# EAGLE board RGBW+Bluetooth+adapter (EAGLE 5.10), part 1 of 3
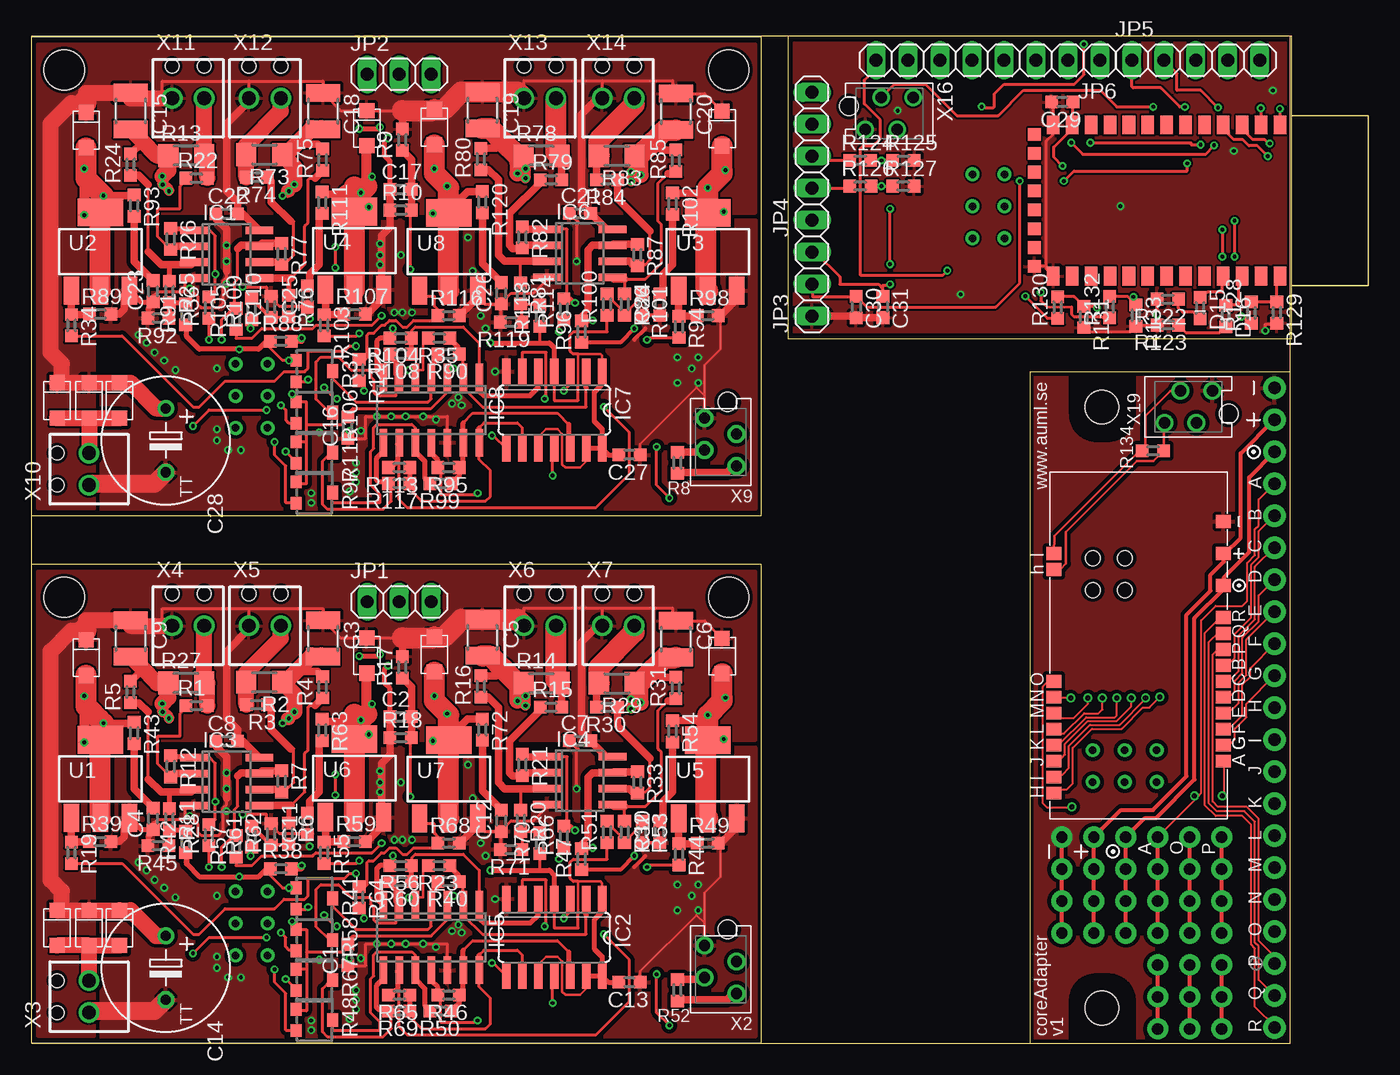
[diagram p0: board, top side]
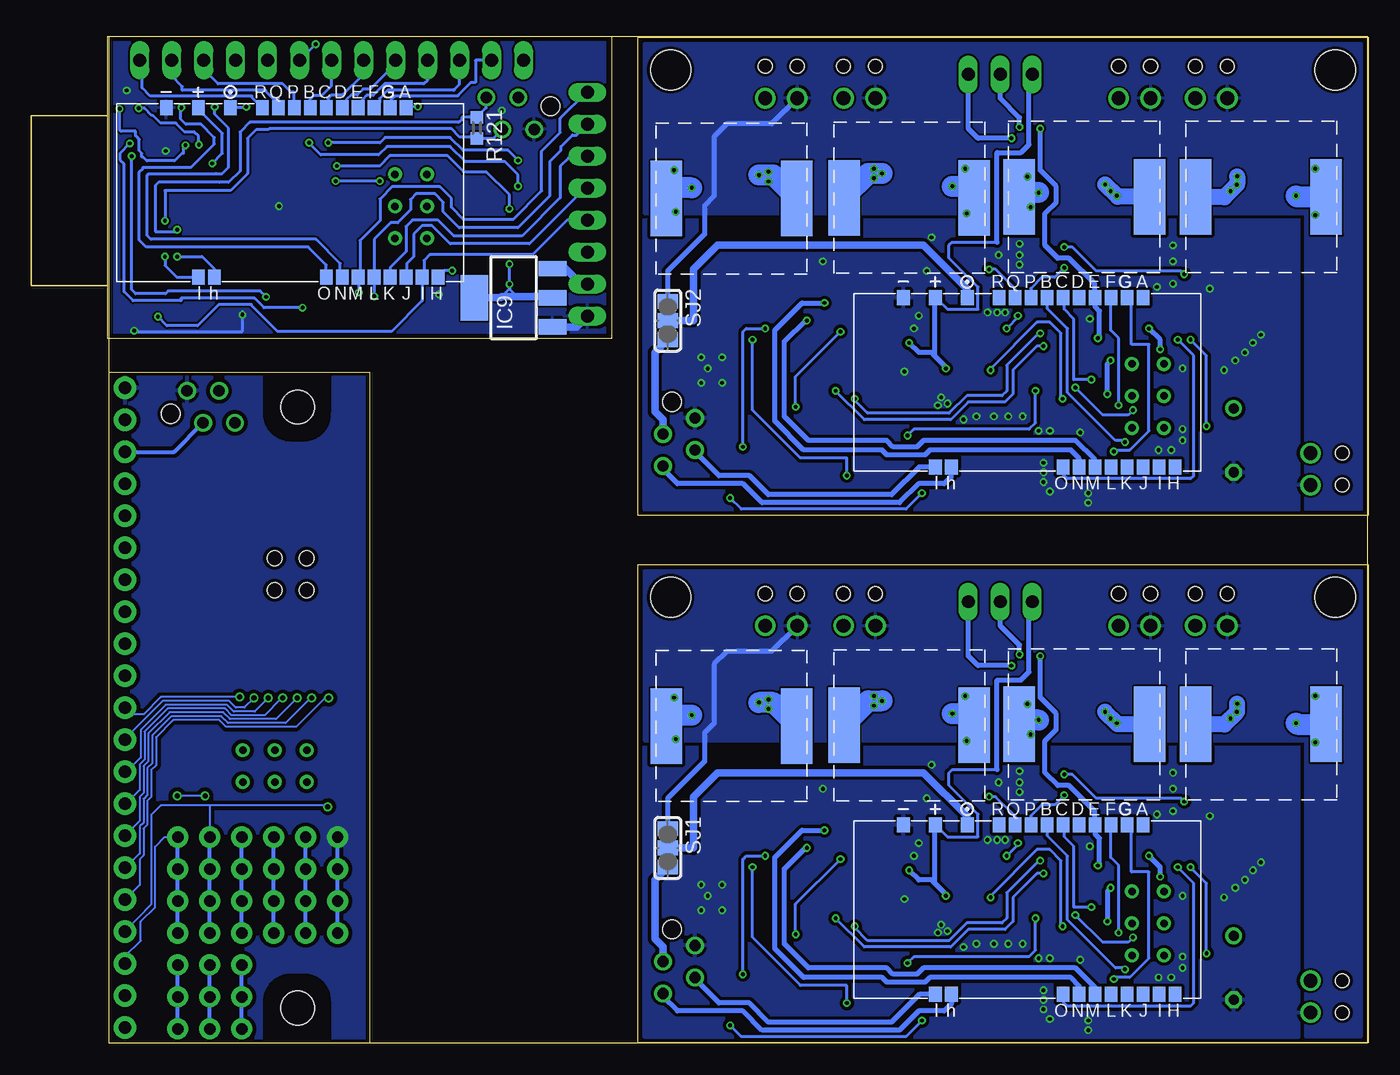
[diagram p1: board, bottom side, seen from below]

Size 100.1 x 80 mm. Coordinates in mm from the lower left corner, seen from the top.
Outline: 0,80 100,80 100,0 0,0 0,80
Outline: 58,80.01 0,80
Outline: 0,0.03 58,0.03 58,38.03 0,38.03 0,0.03
Outline: 0,41.93 58,41.93 58,79.93 0,79.93 0,41.93
Outline: 60.1,56 100.1,56 100.1,80 60.1,80 60.1,56
Outline: 100.01,0 100.01,53.34 79.3,53.34 79.3,0 100.01,0
Copper layers (1*16): Top 0.035mm / dielectric 1.5mm / Bottom 0.035mm
Design rules "ITead_rule": minimum track width 6mil, minimum drill 12mil, track to track 6mil, track to pad 6mil, pad to pad 6mil, via to via 6mil, smd to smd 0mil, copper to edge 10mil, drill to drill 10mil, minimum pad ring 10mil, minimum via ring 6mil, stop-mask expansion 2mil, vias tented up to drill 100mil, thermal gap 10mil
Holes 3.2 mm at 2.6,35.43 55.4,35.43 2.6,77.33 55.4,77.33
Holes 2.7 mm at 85.02,50.55 85.02,2.79

## Footprints (pad centres in the part's own frame; a part is rotated, then mirrored left to right if it is on the bottom)
C0603 = smd 1 x 1: 1 -0.85,0; 2 0.85,0
C1210 = smd 1.4 x 2.7: 1 -1.4,0; 2 1.5,0
TT5D10 = drill 0.813 round: + -2.54,0 | drill 0.813 octagon: - 2.54,0
SOD-123W = smd 1.2 x 1.2: A 1.4,0; C -1.4,0
0603 = smd 0.991 x 1.016: A -0.85,0; C 0.85,0
SO08 = smd 0.6 x 2.2: 1 -1.905,-2.6; 2 -0.635,-2.6; 3 0.635,-2.6; 4 1.905,-2.6; 5 1.905,2.6; 6 0.635,2.6; 7 -0.635,2.6; 8 -1.905,2.6
SO14 = smd 0.66 x 2.032: 1 -3.81,-3.073; 2 -2.54,-3.073; 3 -1.27,-3.073; 4 0,-3.073; 5 1.27,-3.073; 6 2.54,-3.073; 7 3.81,-3.073; 8 3.81,3.073; 9 2.54,3.073; 10 1.27,3.073; 11 0,3.073; 12 -1.27,3.073; 13 -2.54,3.073; 14 -3.81,3.073
SO14' = smd 0.6 x 2.2: 1 -3.81,-2.6; 2 -2.54,-2.6; 3 -1.27,-2.6; 4 0,-2.6; 5 1.27,-2.6; 6 2.54,-2.6; 7 3.81,-2.6; 8 3.81,2.6; 9 2.54,2.6; 10 1.27,2.6; 11 0,2.6; 12 -1.27,2.6; 13 -2.54,2.6; 14 -3.81,2.6
SOT223 = smd 1.219 x 2.235: 1 -2.311,-3.099; 2 0,-3.099; 3 2.311,-3.099 | smd 3.6 x 2.2: 4 0,3.099
1X03 = drill 1.016 long: 1 -2.54,0; 2 0,0; 3 2.54,0
1X05 = drill 1.016 long: 1 -5.08,0; 2 -2.54,0; 3 0,0; 4 2.54,0; 5 5.08,0
1X08 = drill 1.016 long: 1 -8.89,0; 2 -6.35,0; 3 -3.81,0; 4 -1.27,0; 5 1.27,0; 6 3.81,0; 7 6.35,0; 8 8.89,0
R0603 = smd 0.991 x 1.016: 1 -0.85,0; 2 0.85,0
R1206 = smd 1.6 x 1.803: 1 -1.422,0; 2 1.422,0
TRIM_PVZ3 = smd 1 x 0.9: 1 0.5,0.45; 3 2.2,0.45 | smd 1.1 x 0.9: 2 1.35,3.35
SJ_2_NO = smd 1.168 x 1.6: 1 -1.524,0; 2 0,0; 3 1.524,0
12X12 = smd 6 x 2.5: P$1 6,0.79; P$2 6,11.15
BC4 = smd 1.5 x 1: 1 -5.75,9.5; 2 -5.75,8; 3 -5.75,6.5; 4 -5.75,5; 5 -5.75,3.5; 6 -5.75,2; 7 -5.75,0.5; 8 -5.75,-1; 9 -5.75,-2.5; 10 -5.75,-4; 11 -5.75,-5.5; 12 -5.75,-7; 13 -5.75,-8.5; 22 6.25,-8.5; 23 6.25,-7; 24 6.25,-5.5; 25 6.25,-4; 26 6.25,-2.5; 27 6.25,-1; 28 6.25,0.5; 29 6.25,2; 30 6.25,3.5; 31 6.25,5; 32 6.25,6.5; 33 6.25,8; 34 6.25,9.5 | smd 1 x 1: 14 -5,-10; 15 -3.5,-10; 16 -2,-10; 17 -0.5,-10; 18 1,-10; 19 2.5,-10; 20 4,-10; 21 5.5,-10
CORETWO_LAYOUT_ISPHOLES_CU = smd 1 x 1.2: 5V 7.315,-6.648; A -9.195,-6.648; B -1.575,-6.648; C -2.845,-6.648; CANH 6.045,6.814; CANL 7.315,6.814; D -4.115,-6.648; E -5.385,-6.648; F -6.655,-6.648; G -7.925,-6.648; GND 9.855,-6.648; H -11.735,6.814; I -10.465,6.814; J -9.195,6.814; K -7.925,6.814; L -6.655,6.814; M -5.385,6.814; N -4.115,6.814; O -2.845,6.814; P -0.305,-6.648; Q 0.965,-6.648; R 2.235,-6.648; VCAN 4.775,-6.648 | drill 0.6 round: P$1 -10.846,3.708; P$2 -8.306,3.708; P$3 -10.846,1.168; P$4 -8.306,1.168; P$5 -8.306,-1.372; P$6 -10.846,-1.372
MICROMATCH-4 = drill 0.9 round: 1 1.905,1.27; 2 0.635,-1.27; 3 -0.635,1.27; 4 -1.905,-1.27 | hole 1.5: 3.199,-0.562
PCB2 = drill 1.1 round: 1 -2.54,0; 2 0,0 | hole 1.1: -2.54,2.54; 0,2.54
CORE_IOHEAD_NOSILC = drill 1 pad 1.778 round: 1 25.4,0; 2 22.86,0; 3 20.32,0; 4 17.78,0; 5 15.24,0; 6 12.7,0; 7 10.16,0; 8 7.62,0; 9 5.08,0; 10 2.54,0; 11 0,0; 12 -2.54,0; 13 -5.08,0; 14 -7.62,0; 15 -10.16,0; 16 -12.7,0; 17 -15.24,0; 18 -17.78,0; 19 -20.32,0; 20 -22.86,0; 21 -25.4,0
CORETWO_LAYOUT_CU = smd 1 x 1.2: 5V 7.62,-7.258; A -8.89,-7.258; B -1.27,-7.258; C -2.54,-7.258; CANH 6.35,6.204; CANL 7.62,6.204; D -3.81,-7.258; E -5.08,-7.258; F -6.35,-7.258; G -7.62,-7.258; GND 10.16,-7.258; H -11.43,6.204; I -10.16,6.204; J -8.89,6.204; K -7.62,6.204; L -6.35,6.204; M -5.08,6.204; N -3.81,6.204; O -2.54,6.204; P 0,-7.258; Q 1.27,-7.258; R 2.54,-7.258; VCAN 5.08,-7.258 | drill 0.6 round: P$1 -10.541,3.099; P$2 -8.001,3.099; P$3 -10.541,0.559; P$4 -8.001,0.559; P$5 -8.001,-1.981; P$6 -10.541,-1.981 | hole 1.2: 4.699,3.099; 7.239,3.099; 7.239,0.559; 4.699,0.559

## Placement (x,y rotation side)
C1  100n  [C0603]  25.15,7.01 90 top
C2  100n  [C0603]  29.34,25.94 0 top
C3  [C1210]  23.16,32.2 270 top
C4  10n  [C0603]  9.67,17.84 90 top
C5  [C1210]  35.81,32.29 270 top
C6  [C1210]  51.18,32.16 270 top
C7  100n  [C0603]  43.56,24.03 0 top
C8  100n  [C0603]  15.52,24.01 0 top
C9  [C1210]  7.87,32.22 270 top
C10  10n  [C0603]  49.91,16.79 90 top
C11  10n  [C0603]  21.92,17.43 90 top
C12  10n  [C0603]  37.34,17.68 90 top
C13  100n  [C0603]  47.5,4.85 180 top
C14  EEUFK1V102L  [TT5D10]  10.67,6 270 top
C15  [C1210]  7.87,74.11 270 top
C16  100n  [C0603]  25.15,48.91 90 top
C17  100n  [C0603]  29.34,67.84 0 top
C18  [C1210]  23.16,74.11 270 top
C19  [C1210]  35.81,74.19 270 top
C20  [C1210]  51.18,74.06 270 top
C21  100n  [C0603]  43.56,65.93 0 top
C22  100n  [C0603]  15.52,65.91 0 top
C23  10n  [C0603]  9.67,59.74 90 top
C24  10n  [C0603]  49.91,58.69 90 top
C25  10n  [C0603]  21.92,59.34 90 top
C26  10n  [C0603]  37.34,59.58 90 top
C27  100n  [C0603]  47.5,46.75 180 top
C28  EEUFK1V102L  [TT5D10]  10.67,47.9 270 top
C29  100n  [C0603]  81.87,74.77 180 top
C30  0.22µ  [C0603]  65.51,58.5 270 top
C31  100n  [C0603]  67.63,58.5 270 top
D1  [SOD-123W]  4.35,30.64 270 top
D2  [SOD-123W]  26.64,30.8 270 top
D3  [SOD-123W]  32,30.89 270 top
D4  [SOD-123W]  54.86,30.76 270 top
D5  [SOD-123W]  2.03,9.17 270 top
D6  [SOD-123W]  4.57,9.17 270 top
D7  [SOD-123W]  6.98,9.17 270 top
D8  [SOD-123W]  4.35,72.54 270 top
D9  [SOD-123W]  2.03,51.07 270 top
D10  [SOD-123W]  26.64,72.7 270 top
D11  [SOD-123W]  32,72.79 270 top
D12  [SOD-123W]  54.86,72.66 270 top
D13  [SOD-123W]  4.57,51.07 270 top
D14  [SOD-123W]  6.98,51.07 270 top
D15  LED  [0603]  92.83,58.42 270 top
D16  LED  [0603]  94.86,57.78 270 top
IC1  TL082D  [SO08]  15.5,62.69 270 top
IC2  74HC126D  [SO14]  41.53,8.41 180 top
IC3  TL082D  [SO08]  15.5,20.79 270 top
IC4  TL082D  [SO08]  43.56,20.86 270 top
IC5  LM339D  [SO14']  31.75,8.41 180 top
IC6  TL082D  [SO08]  43.56,62.76 270 top
IC7  74HC126D  [SO14]  41.53,50.31 180 top
IC8  LM339D  [SO14']  31.75,50.31 180 top
IC9  LM1117MP-3.3  [SOT223]  67.88,59.23 90 bottom
JP1  [1X03]  29.21,35.08 0 top
JP2  [1X03]  29.21,76.98 0 top
JP3  [1X03]  62.01,60.32 90 top
JP4  [1X05]  62.01,70.48 90 top
JP5  [1X05]  92.49,78.1 0 top
JP6  [1X08]  75.98,78.1 180 top
R1  5k  [R0603]  13.11,26.83 0 top
R2  0R1  [R1206]  18.49,28.7 180 top
R3  5k  [R0603]  17.91,26.9 180 top
R4  5k  [R0603]  23.13,28.29 90 top
R5  5k  [R0603]  7.87,27.91 90 top
R6  250k  [R0603]  20.43,16.66 270 top
R7  250k  [R0603]  19.87,20.81 270 top
R8  [R0603]  51.31,46.12 90 top
R9  47k  [R0603]  29.46,71.77 90 top
R10  12k  [R0603]  29.34,66.19 0 top
R11  250k  [R0603]  10.96,17.8 270 top
R12  250k  [R0603]  11.06,22 270 top
R13  0R1  [R1206]  12.3,70.52 0 top
R14  0R1  [R1206]  40.51,28.6 0 top
R15  5k  [R0603]  41.27,26.7 0 top
R16  5k  [R0603]  35.69,28.35 90 top
R17  47k  [R0603]  29.46,29.87 90 top
R18  12k  [R0603]  29.34,24.29 0 top
R19  10  [R0603]  3.17,15.14 270 top
R20  250k  [R0603]  38.86,17.68 270 top
R21  250k  [R0603]  38.99,22.13 270 top
R22  5k  [R0603]  13.11,68.73 0 top
R23  40k  [R0603]  32.38,14.12 180 top
R24  5k  [R0603]  7.87,69.81 90 top
R25  250k  [R0603]  10.96,59.7 270 top
R26  250k  [R0603]  11.06,63.9 270 top
R27  0R1  [R1206]  12.3,28.62 0 top
R28  1k  [R0603]  14.1,16.54 90 top
R29  0R1  [R1206]  46.48,28.6 180 top
R30  5k  [R0603]  45.72,26.7 180 top
R31  5k  [R0603]  51.18,28.22 90 top
R32  250k  [R0603]  47.12,16.79 270 top
R33  250k  [R0603]  48.13,20.73 270 top
R34  10  [R0603]  3.17,57.04 270 top
R35  40k  [R0603]  32.38,56.02 180 top
R36  1k  [R0603]  14.1,58.44 90 top
R37  [TRIM_PVZ3]  20.57,54.76 270 top
R38  40k  [R0603]  19.81,13.87 0 top
R39  10k  [R0603]  5.46,16.03 0 top
R40  15k  [R0603]  33.15,12.86 180 top
R41  [TRIM_PVZ3]  20.57,12.86 270 top
R42  500  [R0603]  12.25,16.01 90 top
R43  500  [R0603]  8.16,24.65 270 top
R44  10  [R0603]  51.43,15.01 270 top
R45  10k  [R0603]  10.09,15.71 180 top
R46  40k  [R0603]  33.15,3.84 180 top
R47  1k  [R0603]  43.69,14.63 90 top
R48  [TRIM_PVZ3]  20.57,3.2 270 top
R49  10k  [R0603]  53.72,15.9 0 top
R50  15k  [R0603]  32.51,2.57 180 top
R51  500  [R0603]  45.72,16.79 90 top
R52  [R0603]  51.31,4.22 90 top
R53  10k  [R0603]  48.51,16.79 270 top
R54  500  [R0603]  50.93,24.79 270 top
R55  10  [R0603]  23.24,15.14 270 top
R56  40k  [R0603]  29.34,14.12 180 top
R57  1k  [R0603]  16.26,15.65 90 top
R58  [TRIM_PVZ3]  20.57,9.55 270 top
R59  10k  [R0603]  25.65,16.03 0 top
R60  15k  [R0603]  29.34,12.86 180 top
R61  500  [R0603]  17.49,16.42 90 top
R62  10k  [R0603]  19.05,16.61 90 top
R63  500  [R0603]  23.1,24.89 270 top
R64  10  [R0603]  26.04,11.59 270 top
R65  40k  [R0603]  29.21,3.84 180 top
R66  1k  [R0603]  42.29,16.41 90 top
R67  [TRIM_PVZ3]  20.57,6.38 270 top
R68  10k  [R0603]  33.15,15.9 0 top
R69  15k  [R0603]  29.21,2.57 180 top
R70  500  [R0603]  40.39,15.9 90 top
R71  10k  [R0603]  38.1,15.39 180 top
R72  500  [R0603]  35.81,24.92 270 top
R73  0R1  [R1206]  18.49,70.6 180 top
R74  5k  [R0603]  17.91,68.8 180 top
R75  5k  [R0603]  23.13,70.19 90 top
R76  250k  [R0603]  20.43,58.56 270 top
R77  250k  [R0603]  19.87,62.71 270 top
R78  0R1  [R1206]  40.51,70.5 0 top
R79  5k  [R0603]  41.27,68.6 0 top
R80  5k  [R0603]  35.69,70.25 90 top
R81  250k  [R0603]  38.86,59.58 270 top
R82  250k  [R0603]  38.99,64.03 270 top
R83  0R1  [R1206]  46.48,70.5 180 top
R84  5k  [R0603]  45.72,68.6 180 top
R85  5k  [R0603]  51.18,70.12 90 top
R86  250k  [R0603]  47.12,58.69 270 top
R87  250k  [R0603]  48.13,62.63 270 top
R88  40k  [R0603]  19.81,55.77 0 top
R89  10k  [R0603]  5.46,57.93 0 top
R90  15k  [R0603]  33.15,54.76 180 top
R91  500  [R0603]  12.25,57.91 90 top
R92  10k  [R0603]  10.09,57.61 180 top
R93  500  [R0603]  8.16,66.55 270 top
R94  10  [R0603]  51.43,56.91 270 top
R95  40k  [R0603]  33.15,45.74 180 top
R96  1k  [R0603]  43.69,56.53 90 top
R97  [TRIM_PVZ3]  20.57,45.1 270 top
R98  10k  [R0603]  53.72,57.8 0 top
R99  15k  [R0603]  32.51,44.47 180 top
R100  500  [R0603]  45.72,58.69 90 top
R101  10k  [R0603]  48.51,58.69 270 top
R102  500  [R0603]  50.93,66.69 270 top
R103  10  [R0603]  23.24,57.04 270 top
R104  40k  [R0603]  29.34,56.02 180 top
R105  1k  [R0603]  16.26,57.55 90 top
R106  [TRIM_PVZ3]  20.57,51.45 270 top
R107  10k  [R0603]  25.65,57.93 0 top
R108  15k  [R0603]  29.34,54.76 180 top
R109  500  [R0603]  17.49,58.32 90 top
R110  10k  [R0603]  19.05,58.51 90 top
R111  500  [R0603]  23.1,66.79 270 top
R112  10  [R0603]  26.04,53.48 270 top
R113  40k  [R0603]  29.21,45.74 180 top
R114  1k  [R0603]  42.29,58.31 90 top
R115  [TRIM_PVZ3]  20.57,48.28 270 top
R116  10k  [R0603]  33.15,57.8 0 top
R117  15k  [R0603]  29.21,44.47 180 top
R118  500  [R0603]  40.39,57.8 90 top
R119  10k  [R0603]  38.1,57.3 180 top
R120  500  [R0603]  35.81,66.82 270 top
R121  [R0603]  70.79,72.72 270 bottom
R122  1k  [R0603]  90.26,59.11 180 top
R123  1k  [R0603]  90.27,57.07 180 top
R124  4k7  [R0603]  65.83,70.14 0 top
R125  6k8  [R0603]  69.27,70.14 0 top
R126  4k7  [R0603]  65.84,68.1 0 top
R127  6k8  [R0603]  69.25,68.1 0 top
R128  4k7  [R0603]  96.9,58.03 90 top
R129  6k8  [R0603]  98.93,58.05 270 top
R130  4k7  [R0603]  81.52,58.46 90 top
R131  6k8  [R0603]  83.59,57.71 270 top
R132  4k7  [R0603]  85.65,58.5 90 top
R133  6k8  [R0603]  87.73,57.82 270 top
R134  [R0603]  89.08,47.07 180 top
SJ1  [SJ_2_NO]  55.63,15.52 270 bottom
SJ2  [SJ_2_NO]  55.63,57.42 270 bottom
U1  NFT3055L175  [SOT223]  5.48,21 0 top
U2  NFT3055L175  [SOT223]  5.48,62.9 0 top
U3  NFT3055L175  [SOT223]  53.72,62.88 0 top
U4  NFT3055L175  [SOT223]  25.66,62.96 0 top
U5  NFT3055L175  [SOT223]  53.72,20.98 0 top
U6  NFT3055L175  [SOT223]  25.66,21.06 0 top
U7  NFT3055L175  [SOT223]  33.15,20.98 0 top
U8  NFT3055L175  [SOT223]  33.15,62.88 0 top
U$1  12X12  [12X12]  44.58,19.2 90 bottom
U$2  12X12  [12X12]  42.42,31.27 270 bottom
U$3  12X12  [12X12]  16.56,19.34 90 bottom
U$4  12X12  [12X12]  14.48,31.34 270 bottom
U$5  12X12  [12X12]  44.58,61.1 90 bottom
U$6  12X12  [12X12]  42.42,73.17 270 bottom
U$7  12X12  [12X12]  16.56,61.24 90 bottom
U$8  12X12  [12X12]  14.48,73.24 270 bottom
U$9  BT_BC4  [BC4]  89.67,67.21 270 top
X1  CORETWO_LAYOUTISPHOLES_CU  [CORETWO_LAYOUT_ISPHOLES_CU]  27.05,10.7 180 bottom
X2  MICROMATCH-4  [MICROMATCH-4]  54.74,5.87 90 top
X3  BLOCK2  [PCB2]  4.57,4.98 90 top
X4  BLOCK2  [PCB2]  13.72,33.17 0 top
X5  BLOCK2  [PCB2]  19.81,33.17 0 top
X6  BLOCK2  [PCB2]  41.66,33.17 0 top
X7  BLOCK2  [PCB2]  47.88,33.17 0 top
X8  CORETWO_LAYOUTISPHOLES_CU  [CORETWO_LAYOUT_ISPHOLES_CU]  27.05,52.6 180 bottom
X9  MICROMATCH-4  [MICROMATCH-4]  54.74,47.77 90 top
X10  BLOCK2  [PCB2]  4.57,46.88 90 top
X11  BLOCK2  [PCB2]  13.72,75.08 0 top
X12  BLOCK2  [PCB2]  19.81,75.08 0 top
X13  BLOCK2  [PCB2]  41.66,75.08 0 top
X14  BLOCK2  [PCB2]  47.88,75.08 0 top
X15  CORETWO_LAYOUTISPHOLES_CU  [CORETWO_LAYOUT_ISPHOLES_CU]  85.6,67.67 180 bottom
X16  MICROMATCH-4  [MICROMATCH-4]  68.13,73.87 180 top
X17  CORE_IOHEADEXP  [CORE_IOHEAD_NOSILC]  98.73,26.67 90 bottom
X18  CORETWO_LAYOUTALLHOLES_CU  [CORETWO_LAYOUT_CU]  87.41,31.29 90 top
X19  MICROMATCH-4  [MICROMATCH-4]  91.9,50.57 0 top

## Library data of the parts
C1-C31 R1-R134 = rcl
D1-D14 = diode
D15 D16 = led
IC1 IC3-IC6 IC8 = linear
IC2 IC7 = 74xx-eu
IC9 = lm1117mp
JP1-JP6 = pinhead
SJ1 SJ2 = jumper
U1-U8 = NMOS_NTF3055L175
U$1-U$8 = inductor10x10
U$9 = bluetooth
X1 X8 X15 X17 X18 = expboard
X2 X9 X16 X19 = con-amp-micromatch
X3-X7 X10-X14 = terminal_block

## Nets
CANH: R52.1 X1.CANH X2.4
CANH1: R8.1 X8.CANH X9.4
CANH2: R121.1 X15.CANH X16.4
CANH3: R134.1 X18.CANH X19.4
CANL: R52.2 X1.CANL X2.3
CANL1: R8.2 X8.CANL X9.3
CANL2: R121.2 X15.CANL X16.3
CANL3: R134.2 X18.CANL X19.3
EXP_A: JP6.1 X15.A
EXP_A1: X17.4 X18.A
EXP_B: R48.3 X1.B
EXP_B1: R97.3 X8.B
EXP_B2: JP6.2 X15.B
EXP_B3: X17.5 X18.B
EXP_C: R41.3 X1.C
EXP_C1: R37.3 X8.C
EXP_C2: JP6.3 X15.C
EXP_C3: X17.6 X18.C
EXP_D: JP6.4 X15.D
EXP_D1: X17.7 X18.D
EXP_E: JP1.2 R38.2 X1.E
EXP_E1: JP2.2 R88.2 X8.E
EXP_E2: JP6.5 X15.E
EXP_E3: X17.8 X18.E
EXP_F: R58.3 X1.F
EXP_F1: R106.3 X8.F
EXP_F2: JP6.6 X15.F
EXP_F3: X17.9 X18.F
EXP_G: R67.3 X1.G
EXP_G1: R115.3 X8.G
EXP_G2: JP6.7 X15.G
EXP_G3: X17.10 X18.G
EXP_H: JP6.8 X15.H
EXP_H1: X17.11 X18.H
EXP_I: JP4.1 R128.1 X15.I
EXP_I1: X17.12 X18.I
EXP_J: JP4.2 R126.1 X15.J
EXP_J1: X17.13 X18.J
EXP_K: JP4.3 R124.1 X15.K
EXP_K1: X17.14 X18.K
EXP_L: JP4.4 R130.1 X15.L
EXP_L1: X17.15 X18.L
EXP_M: IC4.7 R33.1 R47.2 X1.M
EXP_M1: IC6.7 R87.1 R96.2 X8.M
EXP_M2: JP4.5 R132.1 X15.M
EXP_M3: X17.16 X18.M
EXP_N: IC4.1 R21.1 R66.2 X1.N
EXP_N1: IC6.1 R82.1 R114.2 X8.N
EXP_N2: JP5.1 X15.N
EXP_N3: X17.17 X18.N
EXP_O: IC3.7 R7.1 R57.2 X1.O
EXP_O1: IC1.7 R77.1 R105.2 X8.O
EXP_O2: JP5.2 X15.O
EXP_O3: X17.18 X18.O
EXP_P: IC3.1 R12.1 R28.2 X1.P
EXP_P1: IC1.1 R26.1 R36.2 X8.P
EXP_P2: JP5.3 X15.P
EXP_P3: X17.19 X18.P
EXP_Q: C2.2 R17.1 R18.2 X1.Q
EXP_Q1: C17.2 R9.1 R10.2 X8.Q
EXP_Q2: JP5.4 X15.Q
EXP_Q3: X17.20 X18.Q
EXP_R: JP5.5 X15.R
EXP_R1: X17.21 X18.R
GATE1: R19.1 R39.1 U1.1
GATE2: R55.1 R59.1 U6.1
GATE3: R64.1 R68.1 U7.1
GATE4: R44.1 R49.1 U5.1
GATE5: R34.1 R89.1 U2.1
GATE6: R103.1 R107.1 U4.1
GATE7: R112.1 R116.1 U8.1
GATE8: R94.1 R98.1 U3.1
GND: C1.1 C2.1 C4.1 C7.1 C8.1 C10.1 C11.1 C12.1 C13.1 C14.- IC2.7 IC3.4 IC4.4 IC5.12 JP1.3 R18.1 R39.2 R45.2 R49.2 R53.2 R59.2 R62.2 R68.2 R71.2 U1.3 U5.3 U6.3 U7.3 X1.GND X2.1 X3.1
GND1: C16.1 C17.1 C21.1 C22.1 C23.1 C24.1 C25.1 C26.1 C27.1 C28.- IC1.4 IC6.4 IC7.7 IC8.12 JP2.3 R10.1 R89.2 R92.2 R98.2 R101.2 R107.2 R110.2 R116.2 R119.2 U2.3 U3.3 U4.3 U8.3 X8.GND X9.1 X10.1
GND2: C29.2 C30.2 C31.2 IC9.1 JP3.1 R122.2 R123.2 R125.2 R127.2 R129.2 R131.2 R133.2 U$9.13 U$9.21 U$9.22 X15.GND X16.1
GND3: X17.1 X18.GND X19.1
L1: D1.A R43.1 U1.2 U1.4 U$4.P$2
L2: D4.A R54.1 U5.2 U5.4 U$1.P$2
L3: D2.A R63.1 U6.2 U6.4 U$3.P$2
L4: D3.A R72.1 U7.2 U7.4 U$2.P$2
L5: D8.A R93.1 U2.2 U2.4 U$8.P$2
L6: D12.A R102.1 U3.2 U3.4 U$5.P$2
L7: D10.A R111.1 U4.2 U4.4 U$7.P$2
L8: D11.A R120.1 U8.2 U8.4 U$6.P$2
LINK: D16.A U$9.32
MODE: D15.A U$9.31
N$1: IC5.5 R23.2 R28.1
N$2: IC2.2 IC5.2 R23.1 R40.1
N$3: C3.2 R2.1 R4.2 U$3.P$1
N$4: R2.2 R3.2 X5.2
N$5: C9.2 R5.2 R27.1 U$4.P$1
N$6: IC3.6 R3.1 R7.2
N$7: SJ1.2 X1.VCAN
N$8: C15.2 R13.1 R24.2 U$8.P$1
N$9: IC3.5 R4.1 R6.1
N$10: R13.2 R22.2 X11.2
N$11: C5.2 R14.1 R16.2 U$2.P$1
N$12: R1.2 R27.2 X4.2
N$13: R14.2 R15.2 X6.2
N$14: IC4.2 R15.1 R21.2
N$15: IC1.2 R22.1 R26.2
N$16: IC8.5 R35.2 R36.1
N$17: IC4.3 R16.1 R20.1
N$18: IC8.4 R37.2 R90.2
N$19: IC3.3 R5.1 R11.1
N$20: C6.2 R29.1 R31.2 U$1.P$1
N$21: IC3.2 R1.1 R12.2
N$22: R29.2 R30.2 X7.2
N$23: IC4.6 R30.1 R33.2
N$24: IC1.3 R24.1 R25.1
N$25: IC7.2 IC8.2 R35.1 R90.1
N$26: IC4.5 R31.1 R32.1
N$27: C18.2 R73.1 R75.2 U$7.P$1
N$28: IC2.3 R19.2
N$29: C4.2 R43.2
N$30: IC5.4 R40.2 R41.2
N$31: R73.2 R74.2 X12.2
N$32: R11.2 R42.2 R45.1
N$33: IC1.6 R74.1 R77.2
N$34: IC1.5 R75.1 R76.1
N$35: IC5.11 R46.2 R47.1
N$36: IC5.10 R48.2 R50.2
N$37: IC2.12 IC5.13 R46.1 R50.1
N$38: IC2.11 R44.2
N$39: R32.2 R51.2 R53.1
N$40: C10.2 R54.2
N$41: IC5.7 R56.2 R57.1
N$42: IC5.6 R58.2 R60.2
N$43: IC2.5 IC5.1 R56.1 R60.1
N$44: IC2.6 R55.2
N$45: R6.2 R61.2 R62.1
N$46: C11.2 R63.2
N$47: IC5.9 R65.2 R66.1
N$48: IC5.8 R67.2 R69.2
N$49: IC2.9 IC5.14 R65.1 R69.1
N$50: IC2.8 R64.2
N$51: R20.2 R70.2 R71.1
N$52: C12.2 R72.2
N$53: C19.2 R78.1 R80.2 U$6.P$1
N$54: R78.2 R79.2 X13.2
N$55: IC6.2 R79.1 R82.2
N$56: IC6.3 R80.1 R81.1
N$57: C20.2 R83.1 R85.2 U$5.P$1
N$58: R83.2 R84.2 X14.2
N$59: IC6.6 R84.1 R87.2
N$60: IC6.5 R85.1 R86.1
N$61: IC7.3 R34.2
N$62: R25.2 R91.2 R92.1
N$63: C23.2 R93.2
N$64: IC8.11 R95.2 R96.1
N$65: IC8.10 R97.2 R99.2
N$66: IC7.12 IC8.13 R95.1 R99.1
N$67: IC7.11 R94.2
N$68: R86.2 R100.2 R101.1
N$69: C24.2 R102.2
N$70: IC8.7 R104.2 R105.1
N$71: IC8.6 R106.2 R108.2
N$72: IC7.5 IC8.1 R104.1 R108.1
N$73: IC7.6 R103.2
N$74: R76.2 R109.2 R110.1
N$75: C25.2 R111.2
N$76: IC8.9 R113.2 R114.1
N$77: IC8.8 R115.2 R117.2
N$78: IC7.9 IC8.14 R113.1 R117.1
N$79: IC7.8 R112.2
N$80: R81.2 R118.2 R119.1
N$81: C26.2 R120.2
N$82: SJ2.2 X8.VCAN
N$83: D15.C R122.1
N$84: D16.C R123.1
N$85: R124.2 R125.1 U$9.1
N$86: R126.2 R127.1 U$9.2
N$87: R128.2 R129.1 U$9.34
N$88: R130.2 R131.1 U$9.3
N$89: R132.2 R133.1 U$9.4
V_CAN: SJ1.3 X2.2
V_CAN1: SJ2.3 X9.2
V_CAN2: X15.VCAN X16.2
V_CAN3: X17.3 X18.VCAN X19.2
V_INPUT: D5.A D6.A D7.A X3.2
V_INPUT1: D9.A D13.A D14.A X10.2
V_LED: C3.1 C5.1 C6.1 C7.2 C8.2 C9.1 C14.+ D1.C D2.C D3.C D4.C D5.C D6.C D7.C IC3.8 IC4.8 R17.2 SJ1.1 X4.1 X5.1 X6.1 X7.1
V_LED1: C15.1 C18.1 C19.1 C20.1 C21.2 C22.2 C28.+ D8.C D9.C D10.C D11.C D12.C D13.C D14.C IC1.8 IC6.8 R9.2 SJ2.1 X11.1 X12.1 X13.1 X14.1
VCC: C1.2 C13.2 IC2.1 IC2.4 IC2.10 IC2.13 IC2.14 IC5.3 JP1.1 R38.1 R41.1 R42.1 R48.1 R51.1 R58.1 R61.1 R67.1 R70.1 X1.5V
VCC1: C16.2 C27.2 IC7.1 IC7.4 IC7.10 IC7.13 IC7.14 IC8.3 JP2.1 R37.1 R88.1 R91.1 R97.1 R100.1 R106.1 R109.1 R115.1 R118.1 X8.5V
VCC2: C30.1 IC9.3 JP3.2 X15.5V
VCC3: X17.2 X18.5V
VCC3.3: C29.1 C31.1 IC9.2 IC9.4 JP3.3 U$9.12